# Altium PCB 2019_dev_driver_v2.PcbDoc
Units mil, origin at the board's own origin, x right, y up, seen from the top; angles counter-clockwise.
Board outline 3840 x 2145 mil, 2 copper layers (Top Layer, Bottom Layer); 78 components, 63 nets, 262 pads, 0 vias.
Unrouted connection lines stored in the file: 174.
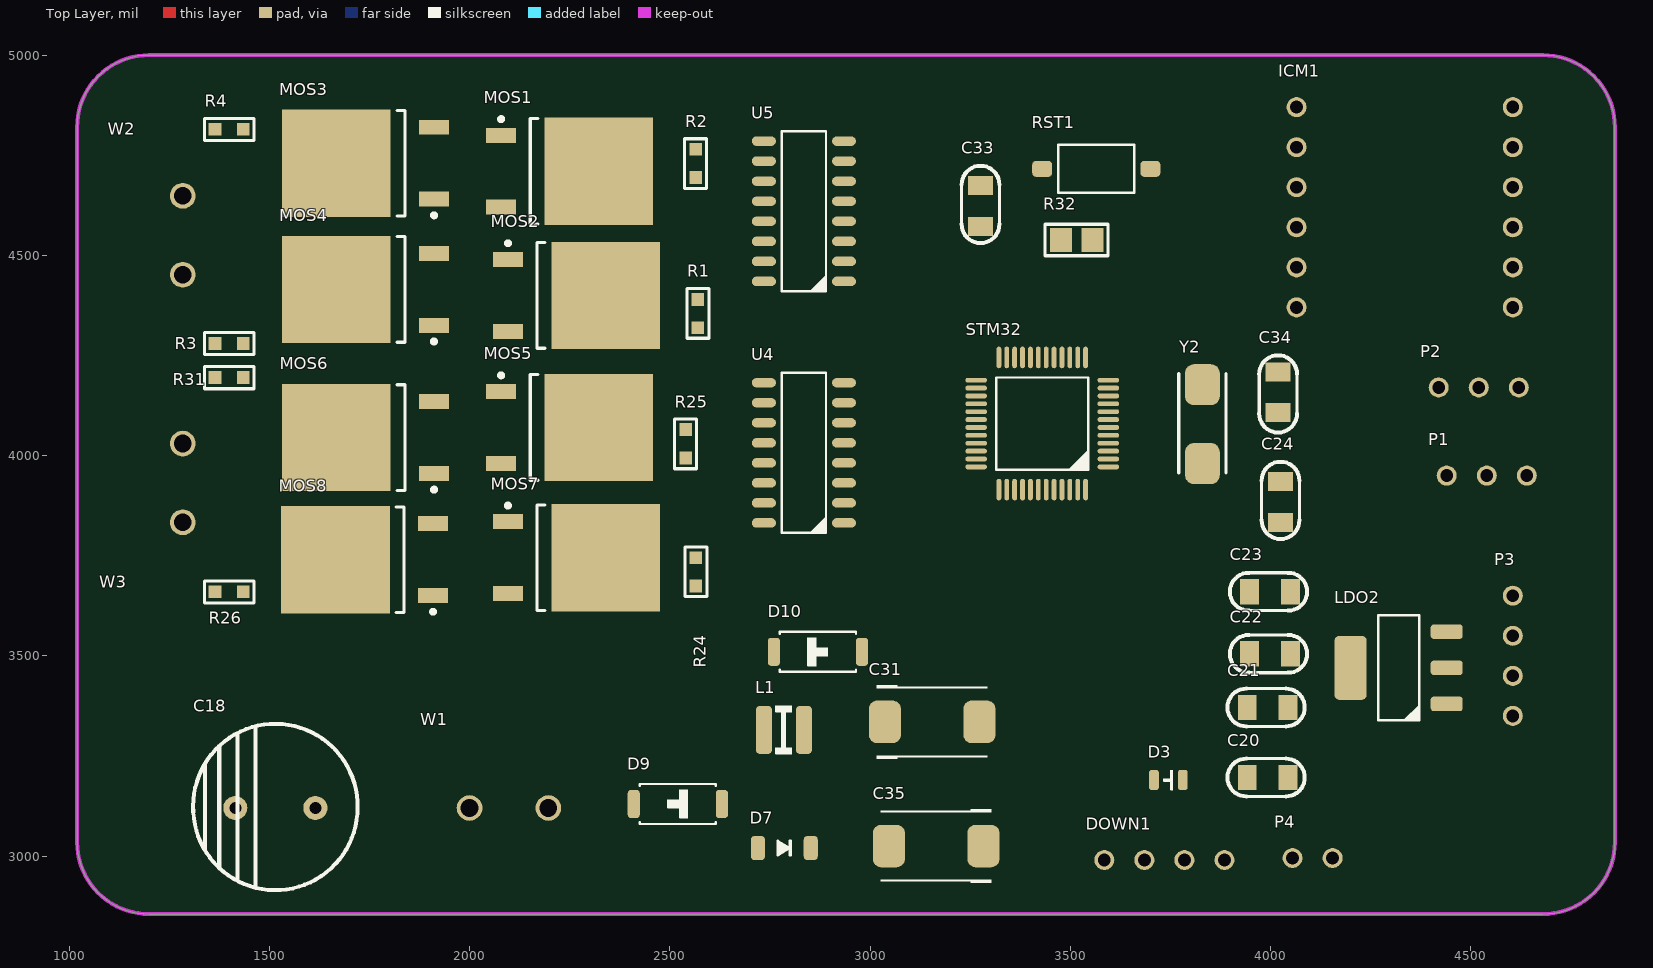
[diagram p0: Top Layer view]
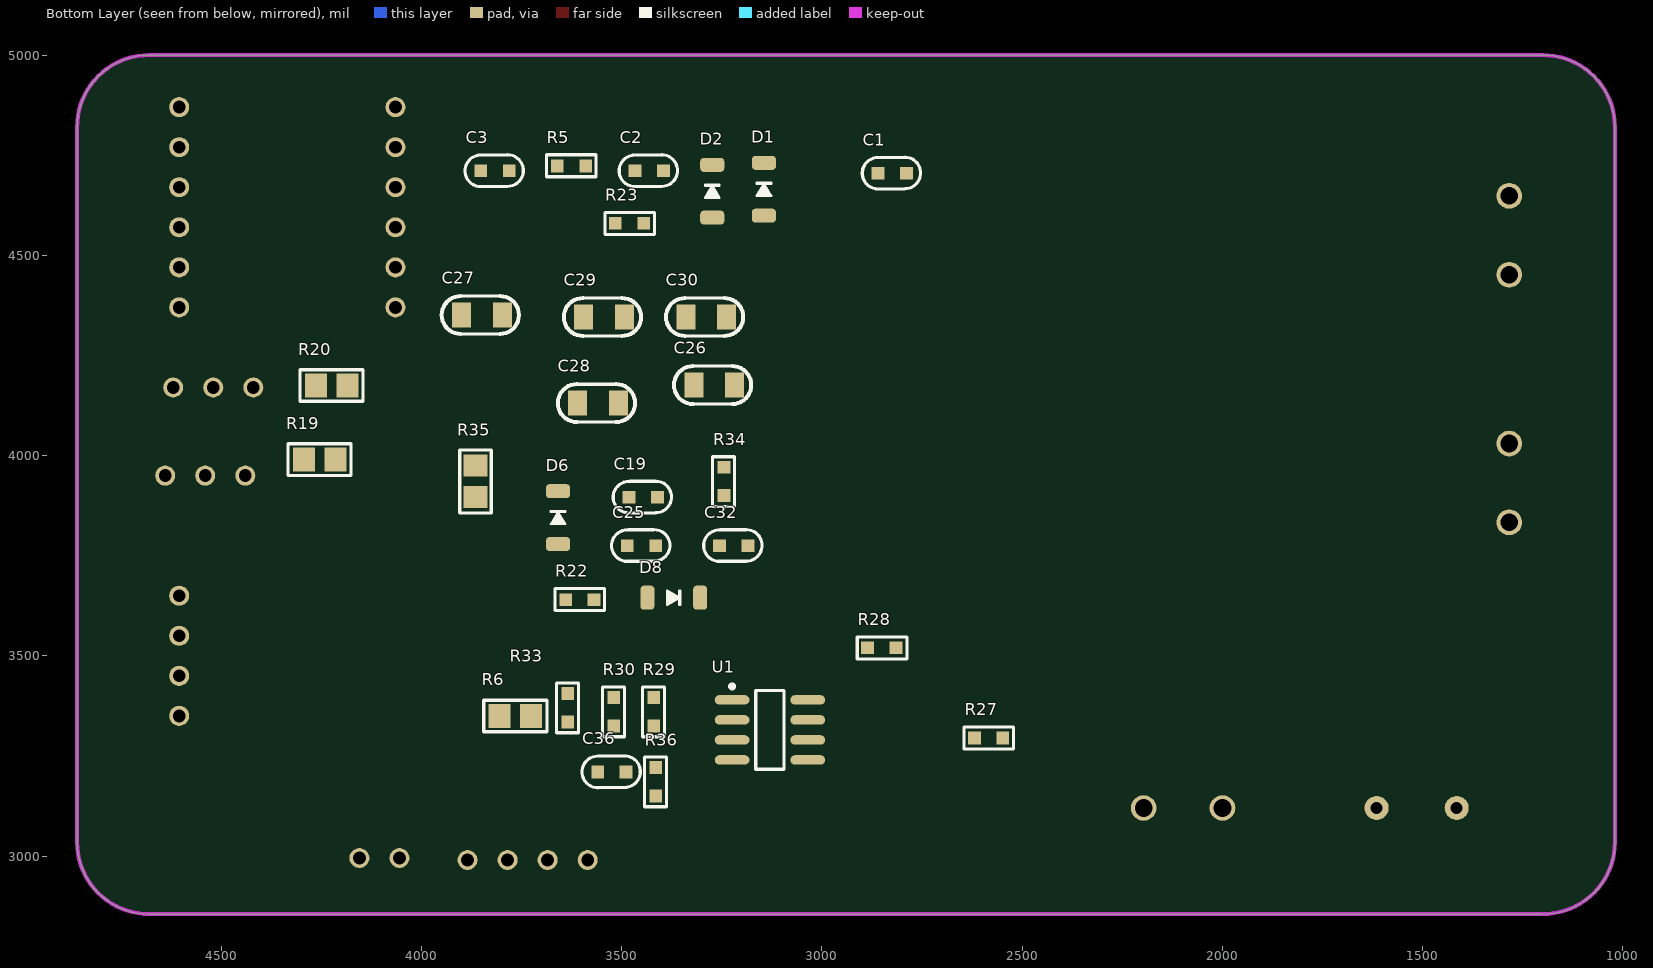
[diagram p1: Bottom Layer view, seen from below]

## Layer stack, top to bottom
Top Solder: solder mask 0.4, Solder Resist, Dk 3.5
Top Layer: signal copper 1.4
Dielectric 1: dielectric 12.6, FR-4, Dk 4.8
Bottom Layer: signal copper 1.4
Bottom Solder: solder mask 0.4, Solder Resist, Dk 3.5

## Board outline
1200,2855 cw(c1200,3035) 1020,3035 1020,4820 cw(c1200,4820) 1200,5000 4680,5000 cw(c4680,4820) 4860,4820 4860,3035 cw(c4680,3035) 4680,2855

## Design rules (kind name [scope] priority, off if disabled: settings)
Clearance [All] p1: gap=5 ignorepadtopadclearanceinfootprint=TRUE
PolygonConnect [All] p1: connectstyle=Relief reliefconductorwidth=10 reliefentries=4 polygonreliefangle="90 Angle" airgapwidth=10
RoutingVias [All] p1: holewidth=28 width=50 viastyle="Through Hole" minholewidth=28 minwidth=50 maxholewidth=28 maxwidth=50
SolderMaskExpansion [All] p1: expansion=4
Width [All] p1: maxlimit=10 minlimit=10 preferedwidth=10
30 further rules are at their usual default settings.

## Components (designator, comment, footprint, x,y, rotation, side; value= is the part's Value field where it differs from the comment)
C1 "Cap_0603" CAP_0603 2827,4704 r180 bottom value=1µF
C2 "Cap_0603" CAP_0603 3434,4710 r180 bottom value=1µF
C3 "Cap_0603" CAP_0603 3819,4710 r180 bottom value=0.1µF
C18 "Cap Pol1" C_ELE2 1615,3120 r180 top value=100pF
C19 "Cap_0603" CAP_0603 3449,3895 r180 bottom value=1µF
C20 "CAP_0805" CAP_0805 3990,3195 r0 top value=10u
C21 "CAP_0805" CAP_0805 3990,3370 r0 top value=0.1u
C22 "CAP_0805" CAP_0805 3996,3504 r0 top value=10u
C23 "CAP_0805" CAP_0805 3996,3659 r0 top value=0.1u
C24 "Cap" CAP_0805 4024,3887 r270 top value=20PF
C25 "Cap_0603" CAP_0603 3453,3774 r180 bottom value=1µF
C26 "CAP_0805" CAP_0805 3272,4175 r180 bottom value=0.1u
C27 "CAP_0805" CAP_0805 3852,4350 r180 bottom value=0.1u
C28 "CAP_0805" CAP_0805 3562,4130 r180 bottom value=0.1u
C29 "CAP_0805" CAP_0805 3547,4345 r180 bottom value=0.1u
C30 "CAP_0805" CAP_0805 3292,4345 r180 bottom value=0.1u
C31 "Cap_Tan_2917" CAP_TAN_D2917 3155,3335 r0 top value=100µF
C32 "Cap_0603" CAP_0603 3223,3774 r180 bottom value=0.1µF
C33 "CAP_0805" CAP_0805 3275,4626 r270 top value=0.1u
C34 "Cap" CAP_0805 4020,4155 r90 top value=20PF
C35 "Cap_Tan_2917" CAP_TAN_D2917 3165,3025 r180 top value=10µF
C36 "Cap_0603" CAP_0603 3527,3209 r180 bottom value=470pF
D1 "Diode_SOD123" SOD-123 3145,4665 r90 bottom value=1N5819
D2 "Diode_SOD123" SOD-123 3274,4660 r90 bottom value=1N5819
D3 "LED_0805" LED_0805_RED 3745,3190 r180 top
D6 "Diode_SOD123" SOD-123 3659,3845 r90 bottom value=1N5819
D7 "Diode_SOD123" SOD-123 2786,3020 r0 top value=1N?
D8 "Diode_SOD123" SOD-123 3370,3645 r180 bottom value=1N5819
D9 "LED_5730" LED_5730_WHITE 2520,3130 r180 top
D10 "LED_5730" LED_5730_WHITE 2870,3510 r0 top
DOWN1 "HDR1x4_2.54" HDR1x4_2.54_180 3885,2990 r270 top
ICM1 "ICM20600" ICM20600_mod 4287.79,4570.85 r180 top
L1 "Ind_CD32" IND_CD32 2785,3315 r0 top value=330µH
LDO2 "LDO1117" SOT223-3 4320,3470 r90 top
MOS1 "LR7843" LR7843 2250,4710 r0 top
MOS2 "LR7843" LR7843 2267.17,4400 r0 top
MOS3 "LR7843" LR7843 1740,4730 r180 top
MOS4 "LR7843" LR7843 1740,4415 r180 top
MOS5 "LR7843" LR7843 2250,4070.16 r0 top
MOS6 "LR7843" LR7843 1740,4045 r180 top
MOS7 "LR7843" LR7843 2267.17,3745 r0 top
MOS8 "LR7843" LR7843 1737.83,3740 r180 top
P1 "HDR1x3_2.54" HDR1X3_2.54_180 4440,3950 r90 top
P2 "HDR1x3_2.54" HDR1X3_2.54_180 4420,4170 r90 top
P3 "HDR1x4_2.54" HDR1x4_2.54_180 4605,3650 r0 top
P4 "HDR1x2_2.54" HDR1X2_2.54_180 4055,2995 r90 top
R1 "Res_0603" RES_0603 2652,4353 r270 top value=10O
R2 "Res_0603" RES_0603 2483,4731 r90 top value=10O
R3 "Res_0603" RES_0603 1398,4198 r180 top value=10O
R4 "Res_0603" RES_0603 1398,4733 r180 top value=10O
R5 "Res_0603" RES_0603 3624,4805 r180 bottom value=10K
R6 "RES_0805" RES_0805 3765,3350 r180 bottom value=1K
R19 "RES_0805" RES_0805 4253.66,3990.25 r180 bottom value=4.7K
R20 "RES_0805" RES_0805 4223.66,4175.25 r180 bottom value=4.7K
R22 "Res_0603" RES_0603 3603,3722 r180 bottom value=0O
R23 "Res_0603" RES_0603 3482,4498 r0 bottom value=0O
R24 "Res_0603" RES_0603 2647,3708 r270 top value=10O
R25 "Res_0603" RES_0603 2458,4031 r90 top value=10O
R26 "Res_0603" RES_0603 1398,3578 r180 top value=10O
R27 "Res_0603" RES_0603 2585.43,3213 r0 bottom value=5.5K
R28 "Res_0603" RES_0603 2852,3438 r0 bottom value=1K
R29 "Res_0603" RES_0603 3502,3362 r90 bottom value=180O
R30 "Res_0603" RES_0603 3602,3362 r90 bottom value=0.22O
R31 "Res_0603" RES_0603 1398,4113 r180 top value=10O
R32 "RES_0805" RES_0805 3515,4538 r180 top value=10K
R33 "Res_0603" RES_0603 3717,3372 r90 bottom value=10K
R34 "Res_0603" RES_0603 3327,3937 r90 bottom value=10K
R35 "RES_0805" RES_0805 3865.25,3936.08 r90 bottom value=10K
R36 "Res_0603" RES_0603 3497,3187 r90 bottom value=1K
RST1 "ButtonTACT_3x6x2.5_180" ButtonTACT_3x6x2.5_180 3565,4716 r180 top
STM32 "STM32F103C" LQFP_P0.5_48 3430,4080 r180 top
U1 "MC34063" 751-02_N 3130,3315 r180 bottom
U4 "HIP4082" SOP_E150_16 2835,4006.86 r180 top
U5 "HIP4082" SOP_E150_16 2835,4610 r180 top
W1 "2Way_5" 2Way_5 2098.43,3120 r180 top
W2 "2Way_5" 2Way_5 1283.93,4550 r90 top
W3 "2Way_5" 2Way_5 1283.93,3931.58 r90 top
Y2 "8M" Osc-6032 3830,4078.43 r90 top

## Footprints (in the part's own frame and the unit in brackets; to place one, negate y for a bottom-side part, rotate by r counter-clockwise, add the part's x,y. Pads: shape width x height; smd on the part's side, far side on the other; paste and mask are expansions set on the pad)
2Way_5 [mil]
  round 64 hole 44: 1(-98.43,0) 2(98.43,0)
  body extent -212,-182 210,192, height 591
751-02_N [mm] "SOIC, 8-Leads, Body 4.9x3.9mm, Pitch 1.27mm, IPC Medium Density"
  oval 2.2x0.6 smd: 1(-2.4,1.905) 2(-2.4,0.635) 3(-2.4,-0.635) 4(-2.4,-1.905) 5(2.4,-1.905) 6(2.4,-0.635) 7(2.4,0.635) 8(2.4,1.905)
  silkscreen extent -2.53,-2.5 0.9,2.88, body extent -1.95,-2.45 1.95,2.45, height 1.75
ButtonTACT_3x6x2.5_180 [mil]
  rrect50% 50x40 smd: 1(-135,0) 2(135,0)
  silkscreen extent -95,-60 95,60, body extent -157,-71 157,71, height 94
C_ELE2 [mil]
  round 60 hole 30: 1(0,0) 2(200,0)
  silkscreen extent -105,-210 305,205
CAP_0603 [mil]
  rect 32x32 smd: 1(-33,1) 2(38,1)
  silkscreen extent -72,-38 73,41, body extent -30,-14 33,18, height 31
CAP_0805 [mil]
  rect 47.24x62.99 smd: 1(-48,1) 2(54,1)
  silkscreen extent -98,-46 95,48, body extent -42,-25 36,24, height 39
CAP_TAN_D2917 [mil]
  rrect50% 80x106 smd: 1(-118,0) 2(118,0)
  silkscreen extent -138,-92 138,92, body extent -150,-78 150,78, height 122
HDR1X2_2.54_180 [mil]
  round 50 hole 32: 1(0,0) 2(0,-100)
  body extent -49,-150 49,50, height 323
HDR1X3_2.54_180 [mil]
  round 50 hole 32: 1(0,0) 2(0,-100) 3(0,-200)
  body extent -49,-250 49,50, height 323
HDR1x4_2.54_180 [mil]
  round 50 hole 32: 1(0,0) 2(0,-100) 3(0,-200) 4(0,-300)
  body extent -49,-350 49,50, height 323
ICM20600_mod [mil]
  round 50 hole 32: 1(222.79,200.85) 2(222.79,100.85) 3(222.79,0.85) 4(222.79,-99.15) 5(222.79,-199.15) 6(222.79,-299.15) 7(-317.21,200.85) 8(-317.21,100.85) 9(-317.21,0.85) 10(-317.21,-99.15) 11(-317.21,-199.15) 12(-317.21,-299.15)
  body extent -366,-349 272,251, height 323
IND_CD32 [mil]
  rrect50% 40x120 smd: 1(-50,0) 2(50,0)
  silkscreen extent -20,-60 20,60, body extent -68,-59 68,59, height 83
LED_0805_RED [mil]
  rrect50% 24x50 smd: 1(-36,0) 2(36,0)
  silkscreen extent -12,-24 12,24, body extent -40,-25 40,25, height 43
LED_5730_WHITE [mil]
  rrect50% 30x70 smd: 1(-110,0) 2(110,0)
  silkscreen extent -95,-50 95,50
LQFP_P0.5_48 [mil]
  oval 54x12 smd: 1(-165,108.27) 2(-165,88.58) 3(-165,68.9) 4(-165,49.21) 5(-165,29.53) 6(-165,9.84) 7(-165,-9.84) 8(-165,-29.53) 9(-165,-49.21) 10(-165,-68.9) 11(-165,-88.58) 12(-165,-108.27) 25(165,-108.27) 26(165,-88.58) 27(165,-68.9) 28(165,-49.21) 29(165,-29.53) 30(165,-9.84) 31(165,9.84) 32(165,29.53) 33(165,49.21) 34(165,68.9) 35(165,88.58) 36(165,108.27)
  oval 12x54 smd: 13(-108.27,-165) 14(-88.58,-165) 15(-68.9,-165) 16(-49.21,-165) 17(-29.53,-165) 18(-9.84,-165) 19(9.84,-165) 20(29.53,-165) 21(49.21,-165) 22(68.9,-165) 23(88.58,-165) 24(108.27,-165) 37(108.27,165) 38(88.58,165) 39(68.9,165) 40(49.21,165) 41(29.53,165) 42(9.84,165) 43(-9.84,165) 44(-29.53,165) 45(-49.21,165) 46(-68.9,165) 47(-88.58,165) 48(-108.27,165)
  silkscreen extent -115,-115 115,115, body extent -177,-178 177,177, height 61
LR7843 [mm] "D-PAK, 3-Pads, Body 6.20x6.72mm (max), IPC Medium Density"
  rect 6.9x6.8 smd: D(1.85,0)
  rect 1.9x0.95 smd: G(-4.35,2.28) S(-4.35,-2.28)
  silkscreen extent -4.47,-3.35 -2,3.43, body extent -2.5,-3.35 3.7,3.35, height 2.38
Osc-6032 [mm]
  rrect50% 2.6x2.2 smd: 1(2.5,0) 2(-2.5,0)
  silkscreen extent -3.1,-1.5 3.2,1.5
RES_0603 [mil]
  rect 32x32 smd: 1(-37,-82) 2(34,-82)
  silkscreen extent -64,-109 60,-54, body extent -31,-98 31,-66, height 18
RES_0805 [mm]
  rect 1.4x1.5 smd: 1(-1.018,-0.006) 2(0.982,-0.006)
  silkscreen extent -2.02,-1.01 1.98,0.99, body extent -1.1,-0.64 0.9,0.62, height 0.6
SOD-123 [mil]
  rrect50% 35x60 smd: 1(-66,0) 2(66,0)
  silkscreen extent -16,-18 16,18, body extent -77,-35 77,35, height 46
SOP_E150_16 [mil]
  oval 60x24 smd: 1(-100,175) 2(-100,125) 3(-100,75) 4(-100,25) 5(-100,-25) 6(-100,-75) 7(-100,-125) 8(-100,-175) 9(100,-175) 10(100,-125) 11(100,-75) 12(100,-25) 13(100,25) 14(100,75) 15(100,125) 16(100,175)
  silkscreen extent -55,-200 55,200, body extent -118,-197 118,197, height 69
SOT223-3 [mil]
  rrect40% 36x80 smd: 1(-90.16,-120) 2(0,-120) 3(90.16,-120)
  rrect30% 160x80 smd: 4(0,120)
  silkscreen extent -131,-51 131,51, body extent -132,-144 132,144, height 71

## Part data
C1 C2 C3 C19 C25 C31 C32 C35 C36: "Capacitor"
C18: "Polarized Capacitor (Radial)", LatestRevisionDate=17-Jul-2002, LatestRevisionNote="Re-released for DXP Platform.", PackageDescription="Polarized Capacitor (Radial); 2 Leads", PackageReference=RB7.6-15, Published=8-Jun-2000, Publisher="Altium Limited"
C20 C21 C22 C23 C26 C27 C28 C29 C30 C33: library part Cap_0603, "Capacitor"
C24 C34: library part Cap_1, "Capacitor", LatestRevisionDate=17-Jul-2002, LatestRevisionNote="Re-released for DXP Platform.", PackageReference=RAD-0.3, Published=8-Jun-2000, Publisher="Altium Limited"
D1 D2 D6 D7 D8: "Diode"
D3 D9 D10: "LED"
DOWN1 P1 P2 P3: "Header"
L1: "Inductor"
LDO2: "Power"
P4: library part HDR1x2_2.54T, "Header"
R1 R2 R3 R4 R5 R6 R19 R20 R22 R23 R24 R25 R26 R27 R28 R29 R30 R31 R32 R33 R34 R35 R36: "Resistor"
RST1: "Button"
STM32: "MCU"
W1 W2 W3: "DB"
Y2: library part C-Osc, "Crystal Oscillator", LatestRevisionDate=17-Jul-2002, LatestRevisionNote="Re-released for DXP Platform.", PackageDescription="Crystal, Thru-Hole; 2 Leads; Body 3.1 x 8.2 mm (Dia.xH)", PackageReference=R38, Published=8-Jun-2000, Publisher="Altium Limited"

## Nets (pads, with @x,y where several pads share a name; then routed paths per layer and width w, separated by ;. In a path a pad name is that pad's centre, name@x,y a point inside that pad or via, vN(x,y) a via of type N, cw(c..) or ccw(c..) an arc to the next point about the centre after c; other vN are vias at no path point)
3V3: C22.2 C23.2 C26.2 C27.2 C28.2 C29.2 C30.2 DOWN1.1 ICM1.1 ICM1.7 LDO2.2 R6.1 R19.1 R20.1 R32.2 STM32.1 STM32.9 STM32.24 STM32.36 STM32.48
5V: C20.2 C21.2 C35.1 LDO2.3 P3.1 P4.1 R28.2 R30.1 U1.6
7.2V: MOS1.D MOS2.D MOS5.D MOS7.D R27.2
12V: C3.2 C31.1 C32.2 D1.1 D2.1 D6.1 D7.2 R33.2 U4.2 U4.7 U5.2 U5.7 U5.12
+7.2V: C18.1 W1.1
BOOT0: R35.1 STM32.44
GND: C3.1 C20.1 C21.1 C22.1 C23.1 C24.1 C26.1 C27.1 C28.1 C29.1 C30.1 C31.2 C32.1 C34.1 C35.2 C36.1 D3.2 D10.2 DOWN1.4 ICM1.2 ICM1.8 LDO2.1 P3.2 P4.2 R5.1 R22.1 R23.1 R34.1 R35.2 R36.1 STM32.8 STM32.23 STM32.35 STM32.47 U1.2 U1.4 U4.6 U4.8 U5.6 U5.8 W1.2
I2C1_SCL: P1.3 R19.2 STM32.45
I2C1_SDA: P2.3 R20.2 STM32.46
ICM_SCK: ICM1.3 ICM1.9 P1.2
ICM_SDATA: ICM1.4 P2.2
MOTO+: C19.2 MOS7.S MOS8.D U4.15 W3.1
MOTO-: C25.2 MOS5.S MOS6.D U4.11 W3.2
MOTOa+: C1.2 MOS2.S MOS4.D U5.15 W2.1
MOTOa-: C2.2 MOS1.S MOS3.D U5.11 W2.2
NetC1_1: C1.1 D1.2 U5.1
NetC2_1: C2.1 D2.2 U5.9
NetC19_1: C19.1 D6.2 U4.1
NetC24_2: C24.2 STM32.5 Y2.2
NetC25_1: C25.1 D8.2 U4.9
NetC33_1: C33.1 RST1.1
NetC34_2: C34.2 STM32.6 Y2.1
NetC36_2: C36.2 U1.3
NetD3_1: D3.1 R6.2
NetD7_1: D7.1 L1.1 U1.1
NetD8_1: D8.1 U4.12
NetD9_1: D9.1 R27.1
NetD10_1: D10.1 R28.1
NetL1_2: L1.2 R29.1 R30.2 U1.7
NetMOS1_G: MOS1.G R2.2
NetMOS2_G: MOS2.G R1.2
NetMOS3_G: MOS3.G R4.2
NetMOS4_G: MOS4.G R3.2
NetMOS5_G: MOS5.G R25.2
NetMOS6_G: MOS6.G R31.2
NetMOS7_G: MOS7.G R24.2
NetMOS8_G: MOS8.G R26.2
NetR1_1: R1.1 U5.16
NetR2_1: R2.1 U5.10
NetR3_1: R3.1 U5.14
NetR4_1: R4.1 U5.13
NetR5_2: R5.2 U5.5
NetR24_1: R24.1 U4.16
NetR25_1: R25.1 U4.10
NetR26_1: R26.1 U4.14
NetR29_2: R29.2 U1.8
NetR31_1: R31.1 U4.13
NetR33_1: R33.1 R36.2 U1.5
NetR34_2: R34.2 U4.5
NSS: ICM1.11 STM32.14
PGND: C18.2 D9.2 MOS3.S MOS4.S MOS6.S MOS8.S R22.2 R23.2
PWM1: STM32.40 U4.4
PWM2: STM32.42 U4.3
PWM3: STM32.18 U5.4
PWM4: STM32.19 U5.3
RST: C33.2 R32.1 RST1.2 STM32.7
SPI1_MISO: ICM1.10 STM32.16
SPI1_MOSI: P2.1 STM32.17
SPI1_SCK: P1.1 STM32.15
SWCLK: DOWN1.3 STM32.37
SWDIO: DOWN1.2 STM32.34
U1_RX: P3.3 STM32.31
U1_TX: P3.4 STM32.30
pads on no net: ICM1.5 ICM1.6 ICM1.12 LDO2.4 STM32.2 STM32.3 STM32.4 STM32.10 STM32.11 STM32.12 STM32.13 STM32.20 STM32.21 STM32.22 STM32.25 STM32.26 STM32.27 STM32.28 STM32.29 STM32.32 STM32.33 STM32.38 STM32.39 STM32.41 STM32.43

## Keep-outs
Keep-Out Layer:
  the board outline again, w10